# EAGLE board lcdpcbstacked (EAGLE 5.06)
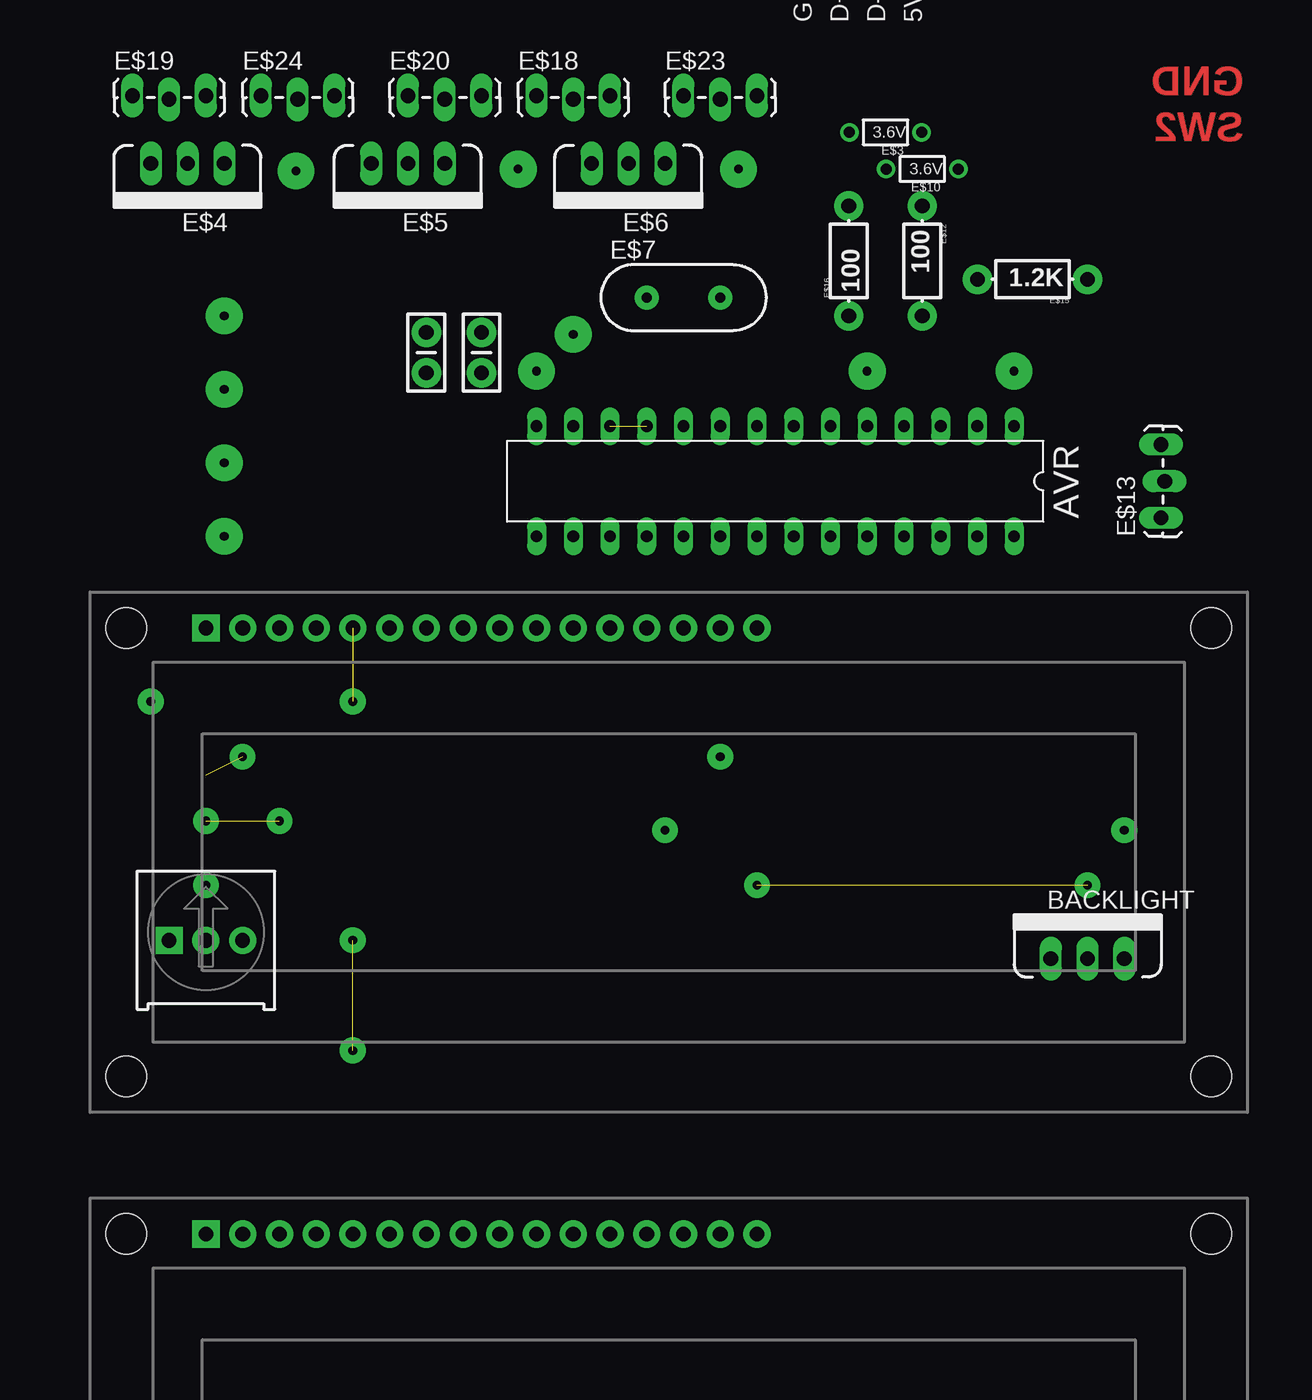
[diagram p0: board, top side]
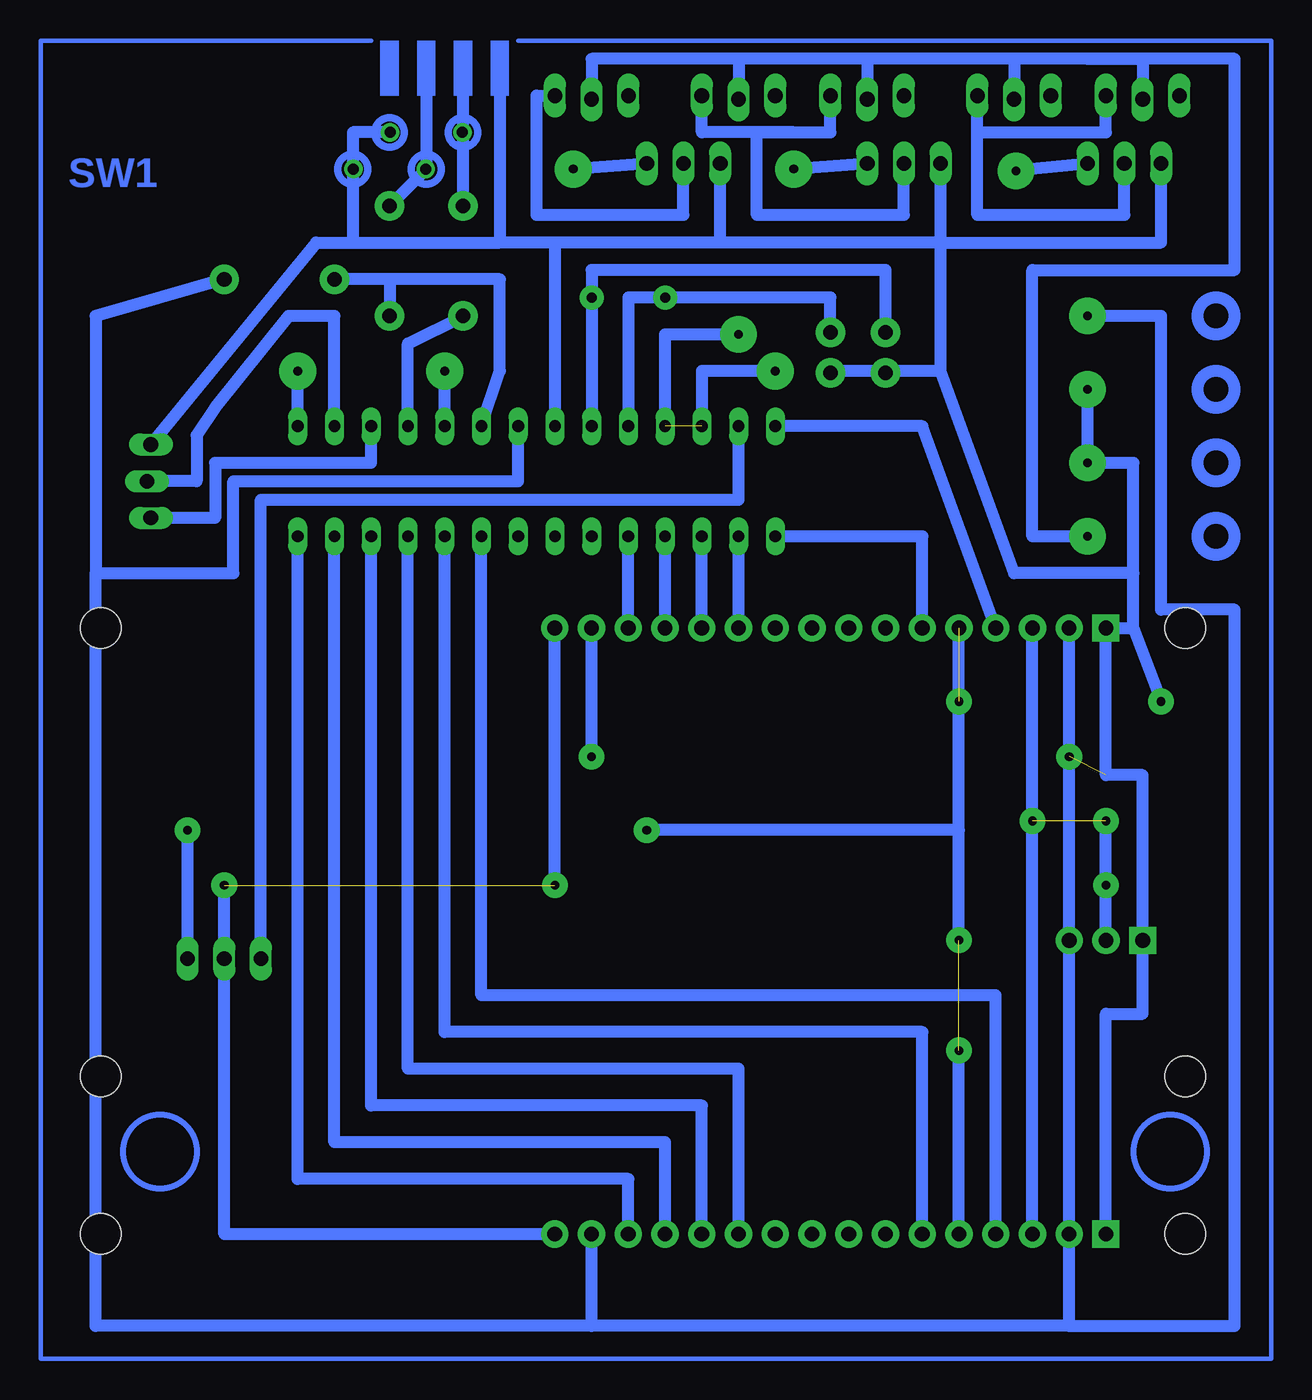
[diagram p1: board, bottom side, seen from below]

No outline drawn. Coordinates in mm, seen from the top.
Copper layers (1*16): Top 0.035mm / dielectric 1.5mm / Bottom 0.035mm
Design rules "default": minimum track width 10mil, minimum drill 24mil, track to track 8mil, track to pad 8mil, pad to pad 8mil, via to via 8mil, smd to smd 8mil, copper to edge 40mil, drill to drill 8mil, minimum pad ring 10mil, minimum via ring 8mil, stop-mask expansion 4mil, vias tented up to drill 0mil, thermal gap 10mil

## Footprints (pad centres in the part's own frame; a part is rotated, then mirrored left to right if it is on the bottom)
DIL28-3 = drill 0.813 long: 1 -16.51,-3.81; 2 -13.97,-3.81; 3 -11.43,-3.81; 4 -8.89,-3.81; 5 -6.35,-3.81; 6 -3.81,-3.81; 7 -1.27,-3.81; 8 1.27,-3.81; 9 3.81,-3.81; 10 6.35,-3.81; 11 8.89,-3.81; 12 11.43,-3.81; 13 13.97,-3.81; 14 16.51,-3.81; 15 16.51,3.81; 16 13.97,3.81; 17 11.43,3.81; 18 8.89,3.81; 19 6.35,3.81; 20 3.81,3.81; 21 1.27,3.81; 22 -1.27,3.81; 23 -3.81,3.81; 24 -6.35,3.81; 25 -8.89,3.81; 26 -11.43,3.81; 27 -13.97,3.81; 28 -16.51,3.81
TO220V = drill 1.016 long: 1 -2.54,0; 2 0,0; 3 2.54,0
LCD-16X2_NOSILK = drill 1.016 pad 1.88 square: 1 -32,15.5 | drill 1.016 pad 1.88 round: 2 -29.46,15.5; 3 -26.92,15.5; 4 -24.38,15.5; 5 -21.84,15.5; 6 -19.3,15.5; 7 -16.76,15.5; 8 -14.22,15.5; 9 -11.68,15.5; 10 -9.14,15.5; 11 -6.6,15.5; 12 -4.06,15.5; 13 -1.52,15.5; 14 1.02,15.5; 15 3.56,15.5; 16 6.1,15.5 | hole 2.8: -37.5,15.5; -37.5,-15.5; 37.5,15.5; 37.5,-15.5
1/6W-RES = drill 0.762 round: 1 -2.5,0; 2 2.5,0
HC49US = drill 0.7 pad 1.651 round: 1 -2.54,0; 2 2.54,0
CAP-PTH-SMALL-KIT = drill 1.016 pad 2.032 round: 1 -1.397,0; 2 1.397,0
3386U = drill 1.016 pad 1.88 square: 1 -2.54,-0.015 | drill 1.016 pad 1.88 round: 2 0,-0.015; 3 2.54,-0.015
AXIAL-0.3-KIT = drill 1.016 pad 2.032 round: P$1 -3.81,0; P$2 3.81,0
1X03_LOCK_LONGPADS = drill 1.016 long: 1 0,0; 2 2.54,-0.254; 3 5.08,0

## Placement (x,y rotation side)
AVR  [DIL28-3]  49.53,44.45 180 top
BACKLIGHT  [TO220V]  71.12,11.43 0 top
E$1  [LCD-16X2_NOSILK]  42.16,18.8 0 top
E$2  [LCD-16X2_NOSILK]  42.16,-23.11 0 top
E$3  3.6V  [1/6W-RES]  57.15,68.58 180 top
E$4  [TO220V]  8.89,66.42 180 top
E$5  [TO220V]  24.13,66.42 180 top
E$6  [TO220V]  39.37,66.42 180 top
E$7  [HC49US]  43.18,57.15 0 top
E$8  [CAP-PTH-SMALL-KIT]  29.21,53.34 270 top
E$9  [CAP-PTH-SMALL-KIT]  25.4,53.34 270 top
E$10  3.6V  [1/6W-RES]  59.69,66.04 180 top
E$11  [3386U]  10.16,12.7 0 top
E$12  100  [AXIAL-0.3-KIT]  59.69,59.69 270 top
E$13  [1X03_LOCK_LONGPADS]  76.2,41.91 90 top
E$15  1.2K  [AXIAL-0.3-KIT]  67.31,58.42 180 top
E$16  100  [AXIAL-0.3-KIT]  54.61,59.69 90 top
E$18  [1X03_LOCK_LONGPADS]  33.02,71.12 0 top
E$19  [1X03_LOCK_LONGPADS]  5.08,71.12 0 top
E$20  [1X03_LOCK_LONGPADS]  24.13,71.12 0 top
E$23  [1X03_LOCK_LONGPADS]  43.18,71.12 0 top
E$24  [1X03_LOCK_LONGPADS]  13.97,71.12 0 top

## Library data of the parts
AVR = atmel
BACKLIGHT E$1-E$13 E$15 E$16 E$18-E$20 E$23 E$24 = SparkFun

## Nets
S$3: AVR.28
S$4: AVR.27
S$5: AVR.26
S$7: AVR.25
S$11: AVR.7 E$15.P$1
S$12: E$12.P$1
S$13: AVR.19
S$15: AVR.18
S$16: AVR.17
S$17: AVR.16
S$18: E$2.1
S$19: AVR.15
S$20: AVR.14
S$21: AVR.11 AVR.12
S$22: AVR.13 BACKLIGHT.1
S$23: BACKLIGHT.2
S$25: AVR.9 E$7.2
S$26: AVR.10 E$7.1
S$28: E$6.2 E$23.3
S$29: E$5.2 E$20.3
S$31: AVR.8 E$4.3 E$13.3
S$32: AVR.4 E$16.P$1
S$33: AVR.5
S$34: AVR.1
S$38: AVR.6 E$12.P$2 E$15.P$2
S$39: E$4.1
S$41: E$5.1
S$42: E$6.1
S$43: E$6.3
S$44: AVR.3 E$13.1
S$45: E$4.2 E$19.3 E$24.3
S$46: E$18.3
S$49: AVR.2
S$50: E$16.P$2
S$51: E$5.3

## Tracks (layer width: path | path; a pad name or v marks a point on that pad's centre or on a via)
S$1
  Bottom 0.305: 60.96,74.93 83.82,74.93 83.82,-16.26 -1.27,-16.26 -1.27,74.93 50.8,74.93
S$2
  Bottom 0.813: 15.24,-7.62 15.24,34.29
S$3
  Bottom 0.813: 43.18,-7.62 43.18,-3.81 66.04,-3.81 AVR.28
S$4
  Bottom 0.813: 40.64,-7.62 40.64,-1.27 63.5,-1.27 AVR.27
S$5
  Bottom 0.813: 38.1,-7.62 38.1,1.27 60.96,1.27 AVR.26
S$6
  Bottom 0.813: 55.88,40.64 55.88,6.35 22.86,6.35 22.86,-7.62
S$7
  Bottom 0.813: AVR.25 58.42,3.81 35.56,3.81 35.56,-7.62
S$8
  Bottom 0.813: 53.34,40.64 53.34,8.89 17.78,8.89 17.78,-7.62
S$9
  Bottom 0.813: 73.66,12.7 73.66,20.32
S$10  (via drill 0.6 pad 2.54)
  Bottom 0.813: v11.43,55.88 6.35,55.88 6.35,35.56 1.27,35.56 1.27,-13.84
S$11
  Bottom 0.813: AVR.7 50.8,44.45 70.48,44.45 70.48,38.1 80.01,38.1 | 80.01,38.1 80.01,-13.97 45.72,-13.97 | 45.72,-13.97 45.72,-7.62 | 12.7,-13.97 1.27,-13.97 | 12.7,-13.97 45.72,-13.97 | 12.7,-13.97 12.7,34.29 | E$15.P$1 80.01,55.88 80.01,38.1
S$12
  Bottom 0.813: E$12.P$1 57.15,66.04
S$13
  Bottom 0.813: 43.18,34.29 AVR.19
S$14
  Bottom 0.813: 10.16,12.7 10.16,20.32
S$15
  Bottom 0.813: 40.64,34.29 AVR.18
S$16
  Bottom 0.813: 38.1,34.29 AVR.17
S$17
  Bottom 0.813: 35.56,34.29 AVR.16
S$19
  Bottom 0.813: AVR.15 22.86,40.64 22.86,34.29
S$20
  Bottom 0.813: 17.78,34.29 22.86,48.26 AVR.14
S$21  (via drill 0.6 pad 2.54)  (1 unrouted)
  Bottom 0.813: v35.56,54.61 40.64,54.61 AVR.11 | AVR.12 38.1,52.07 v33.02,52.07
S$22
  Bottom 0.813: BACKLIGHT.1 68.58,43.18 35.56,43.18 AVR.13
S$23  (via drill 0.6 pad 1.78)  (1 unrouted)
  Bottom 0.813: v48.26,16.51 48.26,34.29 | v71.12,16.51 BACKLIGHT.2 71.12,-7.62 48.26,-7.62
S$24  (via drill 0.6 pad 1.78)
  Bottom 0.813: v45.72,25.4 45.72,34.29
S$25
  Bottom 0.813: AVR.9 E$7.2 45.72,59.05 25.4,59.05 25.4,54.61
S$26
  Bottom 0.813: AVR.10 43.18,57.15 E$7.1 29.21,57.15 29.21,54.61
S$27
  Bottom 0.813: 45.72,71.12 45.72,73.66 35.56,73.66 | 35.56,73.66 35.56,71.12 | 26.67,73.66 35.56,73.66 | 26.67,73.66 26.67,71.12 | 16.51,73.66 26.67,73.66 | 16.51,73.66 16.51,71.12 | 7.62,73.66 16.51,73.66 | 7.62,73.66 7.62,71.12 | 11.43,73.66 7.62,73.66
S$28
  Bottom 0.813: E$6.2 39.37,62.87 49.53,62.87 49.53,71.12 E$23.3
S$29
  Bottom 0.813: E$5.2 24.13,62.87 34.29,62.87 34.29,68.58 29.21,68.58 E$20.3
S$30  (via drill 0.6 pad 1.78)  (2 unrouted)
  Bottom 0.813: 20.32,20.32 20.32,34.29 | 20.32,20.32 v41.91,20.32 | v20.32,12.7 20.32,20.32 | 20.32,-7.62 v20.32,5.08
  other vias: 20.32,29.21
S$31
  Bottom 0.813: E$13.3 64.77,60.96 62.23,60.96 | E$4.3 6.35,60.96 21.59,60.96 | 48.26,60.96 52.07,60.96 | 48.26,60.96 AVR.8 | 21.59,60.96 48.26,60.96 | 21.59,52.07 29.21,52.07 | 21.59,52.07 21.59,60.96 | 21.59,52.07 16.51,38.1 8.26,38.1 | 52.07,71.12 52.07,60.96 | 62.23,60.96 52.07,60.96 | 59.69,68.58 62.23,68.58 62.23,60.96
S$32
  Bottom 0.813: AVR.4 58.42,53.98 E$16.P$1
S$33
  Bottom 0.813: AVR.5 55.88,52.07
S$34  (via drill 0.6 pad 2.54)
  Bottom 0.813: AVR.1 v66.04,52.07
  other vias: 55.88,52.07
S$35  (via drill 0.6 pad 1.78)
  other vias: 73.66,20.32
S$36  (via drill 0.6 pad 1.78)  (1 unrouted)
  other vias: 15.24,20.95 10.16,20.95 10.16,16.51
S$38
  Bottom 0.813: AVR.6 52.07,52.07 52.07,58.42 59.69,58.42 | 59.69,58.42 E$15.P$2 | 59.69,58.42 E$12.P$2
S$39  (via drill 0.6 pad 2.54)
  Bottom 0.813: E$4.1 v16.38,65.91
S$40  (via drill 0.6 pad 2.54)
  Bottom 0.813: 11.43,73.66 1.27,73.66 1.27,59.05 15.24,59.05 15.24,40.64 v11.43,40.64
S$41  (via drill 0.6 pad 2.54)
  Bottom 0.813: E$5.1 v31.75,66.04
S$42  (via drill 0.6 pad 2.54)
  Bottom 0.813: E$6.1 v46.99,66.04
S$43
  Bottom 0.813: 36.83,60.96 E$6.3
S$44
  Bottom 0.813: AVR.3 60.96,45.72 71.75,45.72 71.75,41.91 E$13.1
S$45
  Bottom 0.813: E$19.3 10.16,68.58 19.05,68.58 | E$4.2 8.89,62.87 19.05,62.87 19.05,68.58 | 19.05,68.58 E$24.3
S$46
  Bottom 0.813: E$18.3 38.1,68.58 31.75,68.58
S$48  (via drill 0.6 pad 1.78, 0.6 pad 2.54)  (1 unrouted)
  Bottom 0.813: v11.43,50.8 v11.43,45.72 8.26,45.72 8.26,34.29 | 8.26,34.29 v6.35,29.21 | 8.26,34.29 10.16,34.29 10.16,24.13 7.62,24.13 7.62,7.62 10.16,7.62 10.16,-7.62
  other vias: 12.7,25.4
S$49
  Bottom 0.813: AVR.2 63.5,55.88 66.67,55.88 71.75,49.53 73.03,47.62 73.03,44.45 76.2,44.45
S$50
  Bottom 0.813: E$16.P$2 54.61,71.12
S$51
  Bottom 0.813: 21.59,60.96 E$5.3
S$52
  Bottom 0.813: 57.15,72.39 57.15,66.04
(copper drawn outside any net)
  shapes: Bottom area x4, Bottom circle x10

## Text on the board
Top: GND | SW2
Bottom: SW1
tNames: GND | D+ | D- | 5V